# Altium PCB Top_old.PcbDoc (part 3 of 3)
Units mm, origin at the board's own origin, x right, y up, seen from the top; angles counter-clockwise.
Board outline 65.25 x 71.45 mm, 4 copper layers (Top Layer, GND, PWR_3V3, Bottom Layer), stack 0.603 mm thick; 141 components, 87 nets, 448 pads, 153 vias.
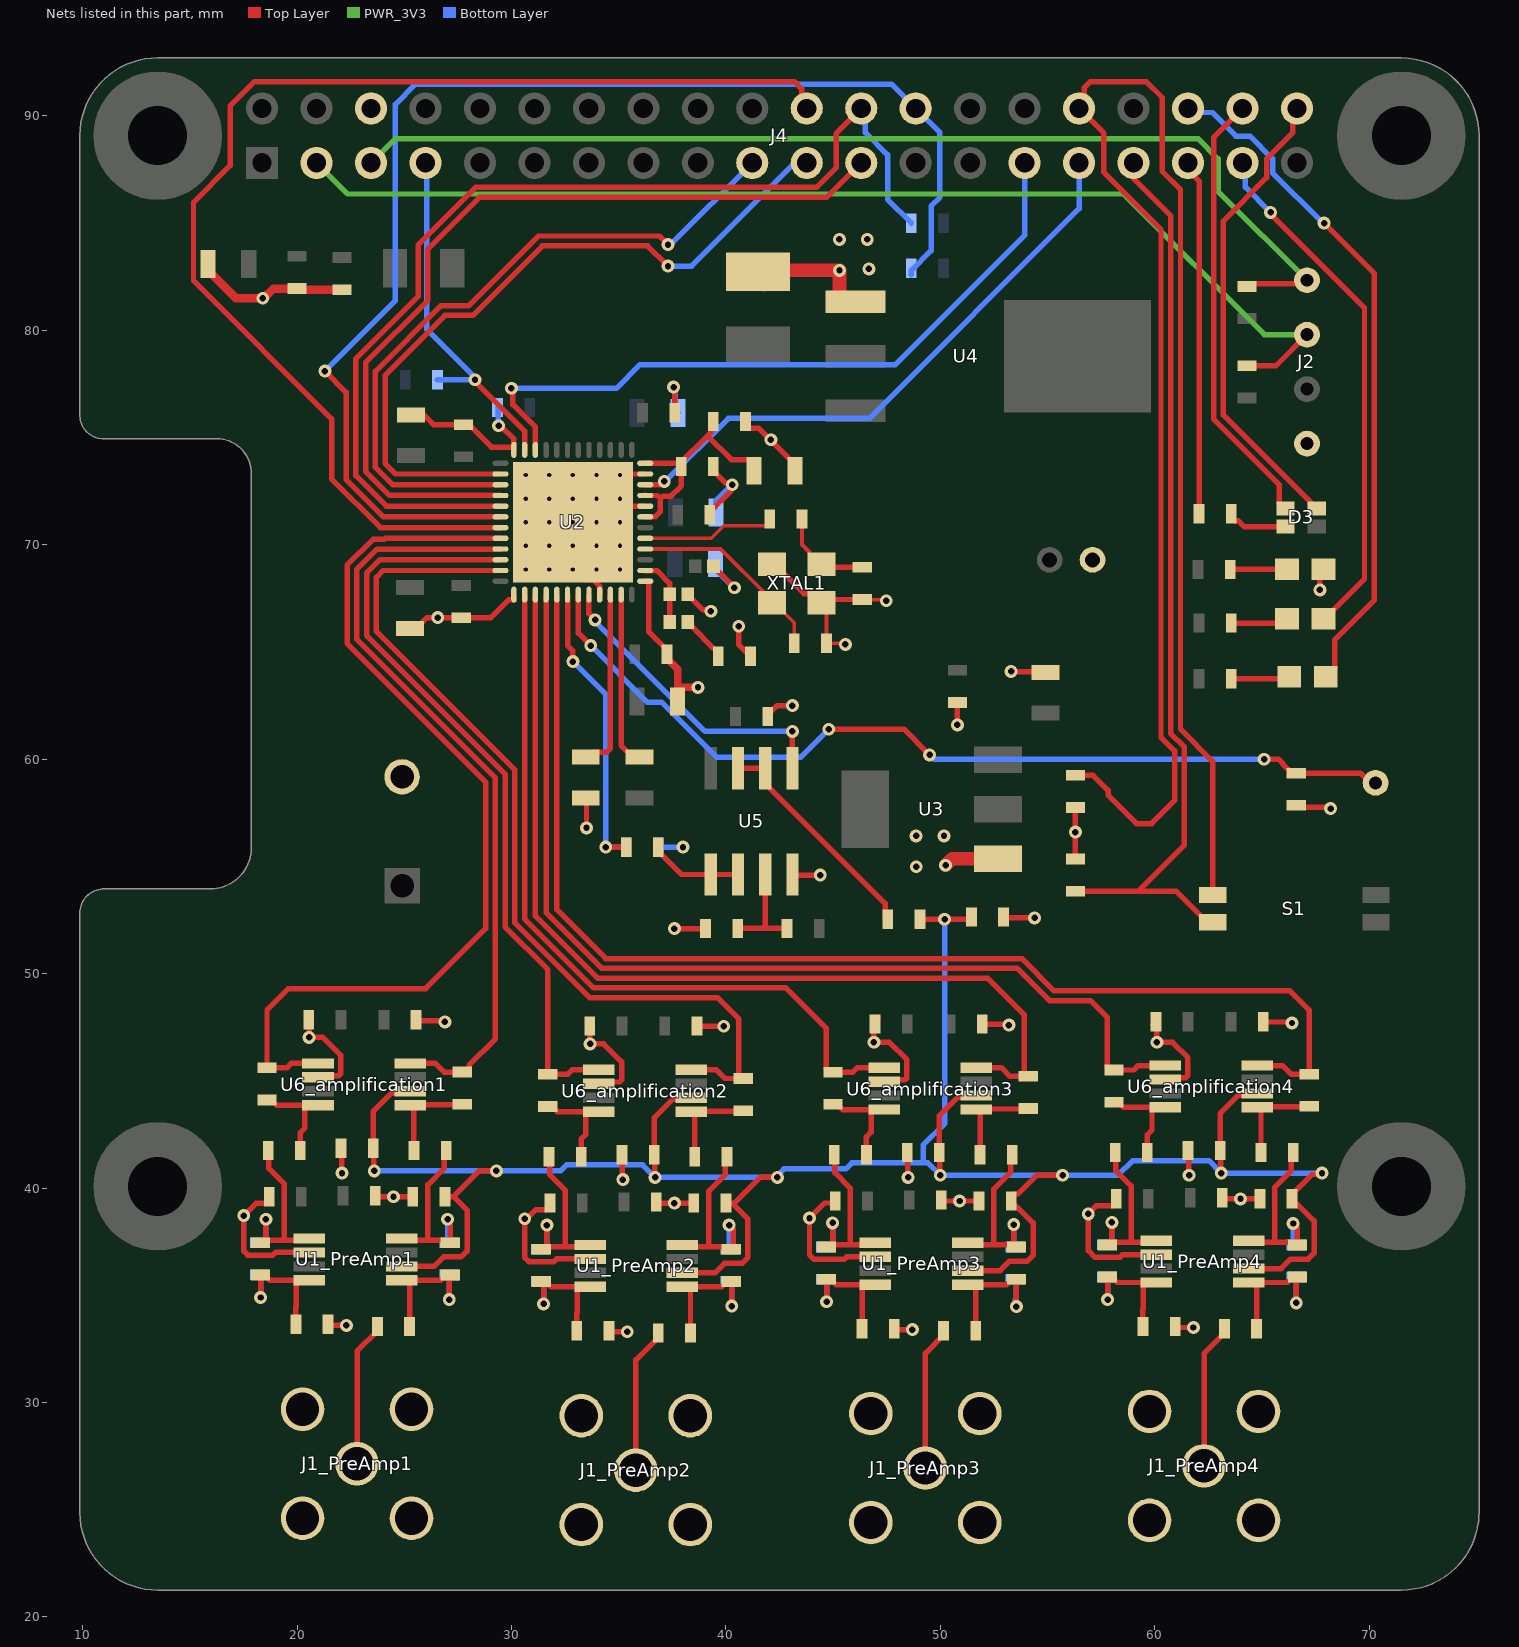
[diagram p4: the nets of this part, all layers, seen from the top]

## Via types
v1: diameter 0.6, hole 0.3, Top Layer to Bottom Layer, tented both sides, 128 vias
v2: diameter 0.5, hole 0.2, Top Layer to Bottom Layer, 25 vias

## Nets (pads, with @x,y where several pads share a name; then routed paths per layer and width w, separated by ;. In a path a pad name is that pad's centre, name@x,y a point inside that pad or via, vN(x,y) a via of type N, cw(c..) or ccw(c..) an arc to the next point about the centre after c; other vN are vias at no path point) (continued)
AINN1: R24_amplification1.2 U2.45 U6_amplification1.4 | length 36.6
  Top Layer w0.254: U6_amplification1.4@25.279,45.815 26.453,45.815 26.856,45.412 R24_amplification1.2@27.704,45.412 27.904,45.412 28.027,45.535 28.027,45.735 29.254,46.961 29.254,59.124 22.792,65.586 22.792,68.862 23.732,69.802 U2.45@29.491,69.802
AINN2: R24_amplification2.2 U2.47 U6_amplification2.4 | length 42.4
  Top Layer w0.254: U2.47@29.491,68.802 24.016,68.802 23.7,68.486 23.7,65.962 30.162,59.5 30.162,52.37 33.648,48.884 39.6,48.884 40.604,47.88 R24_amplification2.2@40.604,45.112 ; U6_amplification2.4@38.379,45.515 39.553,45.515 39.956,45.112 R24_amplification2.2@40.604,45.112 ; R24_amplification2.2@40.804,45.112 R24_amplification2.2@40.604,45.112
AINN3: R24_amplification3.2 U2.3 U6_amplification3.4 | length 45.1
  Top Layer w0.254: U2.3@31.116,67.677 31.116,52.7 34.024,49.792 52.208,49.792 53.904,48.096 R24_amplification3.2@53.904,45.212 ; U6_amplification3.4@51.679,45.615 52.853,45.615 53.256,45.212 R24_amplification3.2@53.904,45.212 ; R24_amplification3.2@54.104,45.212 R24_amplification3.2@53.904,45.212
AINN4: R24_amplification4.2 U2.5 U6_amplification4.4 | length 57.3
  Top Layer w0.254: U2.5@32.116,67.677 32.116,52.984 34.4,50.7 53.8,50.7 55.3,49.2 66.3,49.2 67.204,48.296 R24_amplification4.2@67.204,45.312 66.356,45.312 65.953,45.715 U6_amplification4.4@64.779,45.715
AINP1: R27_amplification1.2 U2.44 U6_amplification1.5 | length 44.2
  Top Layer w0.254: U6_amplification1.5@20.979,45.815 19.731,45.815 19.524,45.608 R27_amplification1.2@18.6,45.608 18.6,48.3 19.6,49.3 26,49.3 28.8,52.1 28.8,58.936 22.338,65.398 22.338,69.05 23.544,70.256 24.066,70.256 24.114,70.304 29.489,70.304 U2.44@29.491,70.302
AINP2: R27_amplification2.2 U2.46 U6_amplification2.5 | length 35.8
  Top Layer w0.254: U2.46@29.491,69.302 29.489,69.304 23.876,69.304 23.246,68.674 23.246,65.774 29.708,59.312 29.708,52.182 31.7,50.19 R27_amplification2.2@31.7,45.308 32.624,45.308 32.831,45.515 U6_amplification2.5@34.079,45.515
AINP3: R27_amplification3.2 U2.2 U6_amplification3.5 | length 36.1
  Top Layer w0.254: U2.2@30.616,67.677 30.616,52.558 33.836,49.338 42.8,49.338 44.677,47.461 44.677,45.531 44.8,45.408 R27_amplification3.2@45,45.408 45.924,45.408 46.131,45.615 U6_amplification3.5@47.379,45.615
AINP4: R27_amplification4.2 U2.4 U6_amplification4.5 | length 48.2
  Top Layer w0.254: U2.4@31.616,67.677 31.616,52.842 34.212,50.246 53.6,50.246 55.1,48.746 57,48.746 57.777,47.969 57.777,45.631 57.9,45.508 R27_amplification4.2@58.1,45.508 59.024,45.508 59.231,45.715 U6_amplification4.5@60.479,45.715
AUXIN1: C30.2 R14.2 U2.6 | length 14.4
  Top Layer w0.254: U2.6@32.616,67.677 32.616,65.302 32.866,65.052 v1(32.866,64.552) ; v1(34.4,55.9) R14.2@35.35,55.9
  Bottom Layer w0.254: v1(32.866,64.552) 34.4,63.018 v1(34.4,55.9) C30.2@35.35,55.9
BIASN: C17.1 U2.10 | length 8.5
  Top Layer w0.254: C17.1@33.466,60.102 33.689,60.325 34.439,60.325 34.618,60.504 34.618,67.675 U2.10@34.616,67.677
BIASP: C10.1 U2.11 | length 8.1
  Top Layer w0.254: U2.11@35.116,67.677 35.118,67.675 35.118,60.65 35.666,60.102 C10.1@35.966,60.102
CM: U2.8 U5.5 | length 14.4
  Top Layer w0.254: U2.8@33.616,67.677 33.614,67.675 33.614,66.786 v1(33.9,66.5) ; v1(43.1,61.3) 43.102,61.297 43.102,59.577 U5.5@43.105,59.575
  Bottom Layer w0.254: v1(33.9,66.5) 33.9,66.426 39.026,61.3 v1(43.1,61.3)
CM_filtered: C2_PreAmp1.2 C2_PreAmp2.2 C2_PreAmp3.2 C2_PreAmp4.2 C34.2 C37_amplification1.2 C37_amplification2.2 C37_amplification3.2 C37_amplification4.2 R22.2 U1_PreAmp1.2 U1_PreAmp2.2 U1_PreAmp3.2 U1_PreAmp4.2 U6_amplification1.2 U6_amplification2.2 U6_amplification3.2 U6_amplification4.2 | length 115
  Top Layer w0.254: v1(23.6,40.8) 23.577,40.823 23.577,41.835 C37_amplification1.2@23.554,41.858 23.554,43.577 24.409,44.432 25.196,44.432 U6_amplification1.2@25.279,44.515 ; U1_PreAmp1.2@24.874,36.349 26.39,36.349 26.832,36.791 27.657,36.791 27.93,37.065 27.93,38.97 27.297,39.603 ; C2_PreAmp1.2@26.904,39.603 27.297,39.603 ; v1(29.3,40.8) 28.493,40.8 27.297,39.603 ; C37_amplification2.2@36.654,41.558 36.654,43.277 37.509,44.132 38.296,44.132 U6_amplification2.2@38.379,44.215 ; v1@36.677,40.523 C37_amplification2.2@36.677,41.535 ; U1_PreAmp2.2@37.974,36.049 39.49,36.049 39.932,36.491 40.757,36.491 41.03,36.765 41.03,38.57 40.297,39.303 C2_PreAmp2.2@40.004,39.303 ; 40.397,39.303 41.593,40.5 v1(42.4,40.5) ; R22.2@49.05,52.54 v1(50.2,52.54) 51.35,52.54 C34.2@51.45,52.64 ; C37_amplification3.2@49.954,41.658 49.954,43.377 50.809,44.232 51.596,44.232 U6_amplification3.2@51.679,44.315 ; v1@49.977,40.623 C37_amplification3.2@49.977,41.635 ; U1_PreAmp3.2@51.274,36.149 52.79,36.149 53.232,36.591 54.057,36.591 54.33,36.865 54.33,38.377 C2_PreAmp3.2@53.304,39.403 53.304,39.603 53.427,39.726 53.627,39.726 54.501,40.6 v1(55.7,40.6) ; C37_amplification4.2@63.054,41.758 63.054,43.477 63.909,44.332 64.696,44.332 U6_amplification4.2@64.779,44.415 ; v1@63.077,40.723 C37_amplification4.2@63.077,41.735 ; U1_PreAmp4.2@64.374,36.249 65.89,36.249 66.332,36.691 67.157,36.691 67.43,36.965 67.43,38.477 C2_PreAmp4.2@66.404,39.503 66.404,39.703 67.335,40.634 67.734,40.634 v1(67.8,40.7)
  Bottom Layer w0.254: v1(23.6,40.8) v1(29.3,40.8) 32.297,40.8 32.578,41.081 36.119,41.081 v1(36.7,40.5) v1(42.4,40.5) 42.4,40.594 42.706,40.9 45.597,40.9 45.878,41.181 49.2,41.181 ; v1(50.2,52.54) 50.2,43 49.2,42 49.2,41.181 ; v1(67.8,40.7) v1(63.1,40.7) 62.519,41.281 58.978,41.281 58.297,40.6 v1(55.7,40.6) v1(50,40.6) 49.419,41.181 49.2,41.181
DVDD: C18.2 C19.2 C20.2 U2.19 U2.21 U2.24 | length 11.7
  Top Layer w0.254: U2.19@36.241,71.302 36.243,71.304 36.701,71.304 36.949,71.552 36.949,72.152 ; U2.21@36.241,72.302 36.243,72.3 36.801,72.3 36.949,72.152 ; U2.24@36.241,73.802 37.793,73.802 C19.2@37.916,73.679 ; 39.091,75.027 37.916,73.852 C19.2@37.916,73.679 ; C20.2@39.416,75.752 39.293,75.629 39.293,75.229 39.147,75.083 40.255,73.975 41.093,73.975 41.316,73.752 C18.2@41.316,73.452 ; 36.949,72.152 37.068,72.271 37.448,72.271 37.903,72.726 37.903,72.73 37.916,72.743 C19.2@37.916,73.652 C19.2@37.916,73.679
GND: B1.2 C2_PreAmp1.1 C2_PreAmp2.1 C2_PreAmp3.1 C2_PreAmp4.1 C3_PreAmp1.2 C3_PreAmp2.2 C3_PreAmp3.2 C3_PreAmp4.2 C4_PreAmp1.2 C4_PreAmp2.2 C4_PreAmp3.2 C4_PreAmp4.2 C6.2 C7.1 C8.2 C9.1 C11.1 C12.2 C13.1 C14.2 C15.1 C16.2 C17.2 C18.1 C19.1 C20.1 C22.1 C23.1 C24.1 C25.1 C26.1 C27.1 C28.1 C29.2 C30.1 C31.2 C32.2 C33.2 C34.1 C35.1 C36.1 C37_amplification1.1 C37_amplification2.1 C37_amplification3.1 C37_amplification4.1 C38_amplification1.2 C38_amplification2.2 C38_amplification3.2 C38_amplification4.2 C39_amplification1.2 C39_amplification2.2 C39_amplification3.2 C39_amplification4.2 D1.2 J1_PreAmp1.2 J1_PreAmp2.2 J1_PreAmp3.2 J1_PreAmp4.2 J2.1 J4.6 R3_PreAmp1.1 R3_PreAmp2.1 R3_PreAmp3.1 R3_PreAmp4.1 R5.1 R6.1 R12.1 R15.1 R20.1 R21.1 U1_PreAmp1.6 U1_PreAmp2.6 U1_PreAmp3.6 U1_PreAmp4.6 U2.1 U2.9 U2.13 U2.20 U2.23 U2.36 U2.49 U3.1 U4.1 U5.4 U6_amplification1.6 U6_amplification2.6 U6_amplification3.6 U6_amplification4.6 XTAL1.2 XTAL1.4 | length 154.5
  Top Layer w0.175: XTAL1.2@44.607,67.449 XTAL1.2@44.457,67.299 44.692,67.064 C35.1@44.692,65.405 v1@45.593,65.405 ; C36.1@46.609,67.449 C36.1@46.355,67.449 46.367,67.437 v1@47.478,67.437
  Top Layer w0.254: C3_PreAmp1.2@18.477,39.3 18.1,39.3 v1(17.518,38.718) 17.518,37.065 17.709,36.873 18.88,36.873 19.006,36.999 U1_PreAmp1.6@20.574,36.999 ; C3_PreAmp1.2@18.7,39.523 C3_PreAmp1.2@18.7,39.603 ; C38_amplification1.2@20.677,48.181 20.554,48.058 C38_amplification1.2@20.554,47.858 20.567,47.845 v1(20.567,47.027) 21.205,47.027 22.041,46.19 22.041,45.341 21.948,45.248 21.062,45.248 U6_amplification1.6@20.979,45.165 ; R3_PreAmp1.1@21.45,33.645 21.495,33.6 v1(22.3,33.6) ; C37_amplification1.1@22.054,41.858 22.077,41.835 22.077,40.723 v1(22.1,40.7) ; C4_PreAmp1.2@23.65,39.648 23.698,39.6 v1(24.5,39.6) 25.401,39.6 C2_PreAmp1.1@25.404,39.603 ; C15.1@25.266,66.102 25.566,66.102 26.066,66.602 v1(26.566,66.602) C16.2@27.666,66.602 29.041,66.602 29.868,67.429 30.114,67.429 30.116,67.431 U2.1@30.116,67.677 ; C39_amplification1.2@25.554,48.058 C39_amplification1.2@25.554,47.858 25.612,47.8 v1@26.9,47.8 ; C6.2@25.566,76.102 25.866,76.102 26.366,75.602 28.02,75.602 29.066,74.556 U2.36@30.114,74.556 ; v1(29.4,75.55) 29.501,75.55 30.114,74.937 U2.36@30.114,74.556 ; U2.36@30.118,74.425 U2.36@30.116,74.427 30.116,74.554 U2.36@30.114,74.556 ; C3_PreAmp2.2@31.8,39.303 31.682,39.185 31.682,39.005 31.677,39 31.14,39 30.711,38.571 v1(30.618,38.571) 30.618,36.765 30.809,36.573 31.98,36.573 32.106,36.699 U1_PreAmp2.6@33.674,36.699 ; v2(32.866,71.052) U2.49@33.616,71.802 ; U2.49@33.429,68.379 33.803,68.379 34.114,68.068 34.114,67.679 U2.9@34.116,67.677 U2.9@34.118,67.675 ; C17.2@33.466,58.202 33.5,58.168 v1(33.5,56.8) ; C38_amplification2.2@33.654,47.558 33.661,47.551 33.661,46.733 v1(33.667,46.727) 34.305,46.727 35.141,45.89 35.141,45.041 35.048,44.948 34.162,44.948 U6_amplification2.6@34.079,44.865 ; R3_PreAmp2.1@34.55,33.345 34.595,33.3 v1(35.4,33.3) ; C37_amplification2.1@35.154,41.558 35.177,41.535 35.177,40.423 v1(35.2,40.4) ; U2.13@36.241,68.302 36.398,68.302 36.4,68.3 36.4,65.95 37.25,65.1 C12.2@37.25,64.9 C12.2@37.25,64.7 ; U2.20@36.241,71.802 U2.49@33.616,71.802 ; U2.23@36.241,73.302 35.116,73.302 v2(35.066,73.252) v2(33.966,72.152) U2.49@33.616,71.802 ; C4_PreAmp2.2@36.75,39.348 36.798,39.3 v1(37.6,39.3) 38.501,39.3 C2_PreAmp2.1@38.504,39.303 ; v1(37.6,52.1) 39.039,52.1 R15.1@39.05,52.111 ; C9.1@37.616,76.152 v1@37.616,77.352 ; C11.1@37.812,62.638 37.812,62.7 C11.1@37.812,63.188 ; C24.1@38.22,67.7 38.22,67.68 38.934,66.966 39.234,66.966 v1(39.3,66.9) ; C39_amplification2.2@38.612,47.547 v1(39.9,47.547) ; C39_amplification2.2@38.654,47.558 C39_amplification2.2@38.654,47.758 ; C14.2@39.266,71.352 39.266,71.552 40.234,72.52 40.234,72.734 v1(40.3,72.8) 40.234,72.866 40.002,72.866 39.416,73.452 C19.1@39.416,73.652 ; C23.1@39.404,69.159 39.404,68.884 C23.1@39.42,68.9 ; C23.1@39.42,69 39.42,68.98 v1(40.4,68) ; v1(40.6,66.2) 40.6,65.35 R5.1@41.15,64.8 ; C20.1@40.916,75.752 40.916,75.552 41.039,75.429 41.539,75.429 43.216,73.752 C18.1@43.216,73.452 ; C29.2@41.95,61.989 41.95,62.066 42.384,62.5 v1(43.1,62.5) ; XTAL1.4@42.157,69.099 42.257,69.099 43.634,67.722 44.034,67.722 XTAL1.2@44.457,67.299 ; U5.4@43.105,54.625 43.13,54.6 v1(44.4,54.6) ; XTAL1.2@44.607,67.449 C36.1@46.355,67.449 ; C3_PreAmp3.2@45.1,39.403 45.1,39.306 44.609,39.306 43.903,38.6 v1(43.9,38.6) 43.9,36.882 44.109,36.673 45.512,36.673 45.638,36.799 U1_PreAmp3.6@46.974,36.799 ; C38_amplification3.2@46.831,47.6 C38_amplification3.2@46.9,47.531 ; C38_amplification3.2@47.077,47.981 46.954,47.858 C38_amplification3.2@46.954,47.658 46.9,47.603 C38_amplification3.2@46.9,47.531 ; U6_amplification3.6@47.379,44.965 47.462,45.048 48.348,45.048 48.441,45.141 48.441,45.99 47.631,46.8 v1(46.9,46.8) C38_amplification3.2@46.9,47.531 ; R3_PreAmp3.1@47.85,33.445 47.895,33.4 v1(48.7,33.4) ; C37_amplification3.1@48.454,41.658 48.477,41.635 48.477,40.523 v1(48.5,40.5) ; C4_PreAmp3.2@50.05,39.448 50.098,39.4 v1(50.9,39.4) 51.801,39.4 C2_PreAmp3.1@51.804,39.403 ; v1(50.8,61.6) C25.1@50.8,62.65 ; C39_amplification3.2@51.912,47.647 v1@53.2,47.647 ; C39_amplification3.2@51.954,47.658 C39_amplification3.2@51.954,47.858 ; C34.1@52.95,52.64 52.99,52.6 v1(54.4,52.6) ; v1(53.3,64.1) 53.325,64.075 54.875,64.075 C26.1@54.9,64.05 ; R21.1@56.3,55.35 v1(56.3,56.6) R20.1@56.3,57.75 ; C3_PreAmp4.2@58.2,39.503 58.2,39.303 58.077,39.18 57.28,39.18 v1(56.9,38.8) 56.9,37.082 57.209,36.773 58.38,36.773 58.506,36.899 U1_PreAmp4.6@60.074,36.899 ; C38_amplification4.2@59.898,47.602 60.1,47.4 v1(60.1,46.8) 60.831,46.8 61.541,46.09 61.541,45.241 61.448,45.148 60.562,45.148 U6_amplification4.6@60.479,45.065 ; C38_amplification4.2@60.067,47.745 C38_amplification4.2@60.054,47.758 60.054,47.958 C38_amplification4.2@60.177,48.081 ; R3_PreAmp4.1@60.95,33.545 60.995,33.5 v1(61.8,33.5) ; C37_amplification4.1@61.554,41.758 61.577,41.735 61.577,40.623 v1(61.6,40.6) ; C4_PreAmp4.2@63.15,39.548 63.198,39.5 v1(64,39.5) 64.901,39.5 C2_PreAmp4.1@64.904,39.503 ; C39_amplification4.2@65.054,47.758 C39_amplification4.2@65.054,47.958 ; C39_amplification4.2@65.112,47.747 v1@66.4,47.747 ; R12.1@66.6,57.85 66.684,57.766 68.134,57.766 v1(68.2,57.7) ; v1(67.7,67.9) 67.7,68.681 D1.2@67.869,68.85
  Top Layer w0.35: C12.2@37.25,64.7 37.75,64.2 37.75,63.227 C11.1@37.812,63.288 ; C11.1@37.812,62.638 C11.1@37.75,62.7 C11.1@37.812,62.7 ; C11.1@37.812,63.188 37.973,63.35 v1(38.7,63.35)
  Top Layer w0.4: C31.2@15.85,83.1 15.85,82.8 17.15,81.5 v1(18.4,81.5) 18.454,81.5 18.904,81.95 C33.2@20,81.95 20.05,81.9 C32.2@22.1,81.9
  Top Layer w0.635: C28.1@41.5,82.725 41.575,82.8 v1(45.3,82.8) 45.3,81.548 45.508,81.34 U4.1@46.045,81.34 ; C28.1@41.8,82.125 C28.1@42.112,82.437 ; v1(50.246,55.054) 50.548,55.356 U3.1@52.699,55.356
  Bottom Layer w0.254: R6.1@29.35,76.4 29.375,76.375 29.375,75.575 v1(29.4,75.55) ; C30.1@36.85,55.9 v1(38,55.9) ; v1(37.566,77.352) 37.632,77.286 37.632,76.286 C8.2@37.766,76.152 ; C22.1@39.516,69.152 39.516,68.852 40.4,67.968 v1@40.4,67.9 ; C13.1@39.516,71.752 39.516,72.052 40.264,72.8 v1(40.3,72.8)
  other v1: 53.2,47.6 66.4,47.7 26.9,47.753 48.878,54.984 48.873,56.427 50.173,56.427 45.573,65.358 47.478,67.39 42.1,74.9 46.668,82.87 45.295,84.243 46.595,84.243
  other v2: 30.666,68.852 31.766,68.852 32.866,68.852 33.966,68.852 35.066,68.852 30.666,69.952 31.766,69.952 32.866,69.952 33.966,69.952 35.066,69.952 30.666,71.052 31.766,71.052 33.966,71.052 35.066,71.052 30.666,72.152 31.766,72.152 32.866,72.152 35.066,72.152 30.666,73.252 31.766,73.252 32.866,73.252 33.966,73.252
GPIO2: J4.22 U2.43 | length 57.9
  Top Layer w0.254: U2.43@29.491,70.802 23.888,70.802 21.619,73.071 21.619,75.869 15.173,82.315 15.173,85.97 16.883,87.68 16.883,90.46 18.023,91.6 43.2,91.6 43.534,91.266 43.534,90.588 J4.22@43.772,90.35
GPIO3: J4.26 R7.1 U2.42 | length 61.8
  Top Layer w0.254: v1(21.3,78.1) 22.289,77.111 22.289,73.043 24.03,71.302 U2.42@29.491,71.302 ; J4.26@48.9,90.9 48.852,90.852 J4.26@48.852,90.35 J4.26@48.947,90.445
  Bottom Layer w0.254: v1(21.3,78.1) 24.583,81.383 24.583,90.54 25.524,91.481 47.721,91.481 J4.26@48.852,90.35 49.983,89.219 49.983,86.206 49.573,85.796 49.573,83.723 48.65,82.8 R7.1@48.65,82.6
GPIO4: J4.7 R9.1 U2.35 | length 17
  Top Layer w0.254: v1(28.3,77.7) 28.3,77.613 30.616,75.297 U2.35@30.616,74.427
  Bottom Layer w0.254: J4.7@25.992,87.81 26.046,87.756 26.046,80.054 28.3,77.8 v1(28.3,77.7) R9.1@26.55,77.7
GPIO5: J4.29 U2.34 | length 33.6
  Top Layer w0.254: v1(30,77.3) 30.066,77.234 30.066,76.534 31.116,75.484 U2.34@31.116,74.427
  Bottom Layer w0.254: v1(30,77.3) 34.9,77.3 36,78.4 47.9,78.4 53.932,84.432 J4.29@53.932,87.81
GPIO6: J4.31 U2.22 | length 27.7
  Top Layer w0.254: U2.22@36.241,72.802 36.243,72.804 36.924,72.804 37.076,72.956 v1(37.128,72.956)
  Bottom Layer w0.254: v1(37.128,72.956) 37.17,72.956 40.114,75.9 46.7,75.9 56.472,85.672 J4.31@56.472,87.81
MISO: J4.21 U2.38 | length 34.3
  Top Layer w0.254: U2.38@29.491,73.302 24.598,73.302 24.105,73.795 24.105,77.905 26.9,80.7 28.2,80.7 31.446,83.946 36.354,83.946 v1(37.3,83)
  Bottom Layer w0.254: v1(37.3,83) 38.4,83 43.21,87.81 J4.21@43.772,87.81
MOSI: J4.19 U2.39 | length 32.6
  Top Layer w0.254: U2.39@29.491,72.802 24.456,72.802 23.651,73.607 23.651,78.093 26.712,81.154 28.012,81.154 31.258,84.4 36.9,84.4 v1(37.3,84)
  Bottom Layer w0.254: v1(37.3,84) 37.422,84 J4.19@41.232,87.81
NetC1_PreAmp1_1: C1_PreAmp1.1 R1_PreAmp1.1 R2_PreAmp1.2 U1_PreAmp1.1 | length 6.8
  Top Layer w0.254: U1_PreAmp1.1@24.874,35.699 U1_PreAmp1.1@25.137,35.699 ; R2_PreAmp1.2@25.25,33.545 25.25,35.586 U1_PreAmp1.1@25.137,35.699 ; v1(27.1,34.8) C1_PreAmp1.1@27.1,35.897 ; C1_PreAmp1.1@27.153,35.95 26.953,35.95 26.702,35.699 U1_PreAmp1.1@25.137,35.699
  Bottom Layer w0.254: v1(27.1,34.8) R1_PreAmp1.1@27.1,35.95
NetC1_PreAmp1_2: C1_PreAmp1.2 R1_PreAmp1.2 R25_amplification1.1 U1_PreAmp1.4 | length 8.8
  Top Layer w0.254: U1_PreAmp1.4@24.874,37.649 24.957,37.566 C1_PreAmp1.2@26.837,37.566 ; 26.1,37.6 26.1,40.152 26.875,40.927 26.875,41.678 R25_amplification1.1@26.954,41.758 ; C1_PreAmp1.2@26.83,37.573 C1_PreAmp1.2@26.837,37.566 ; 27.153,38.247 C1_PreAmp1.2@27.153,37.45 26.953,37.45 C1_PreAmp1.2@26.837,37.566
  Bottom Layer w0.254: v1(27.025,38.55) 27.025,37.525 R1_PreAmp1.2@27.1,37.45
NetC1_PreAmp2_1: C1_PreAmp2.1 R1_PreAmp2.1 R2_PreAmp2.2 U1_PreAmp2.1 | length 6.9
  Top Layer w0.254: U1_PreAmp2.1@37.974,35.399 U1_PreAmp2.1@38.237,35.399 ; R2_PreAmp2.2@38.35,33.245 38.35,35.286 U1_PreAmp2.1@38.237,35.399 ; C1_PreAmp2.1@40.253,35.65 40.053,35.65 39.802,35.399 U1_PreAmp2.1@38.237,35.399 ; v1(40.275,34.5) 40.275,35.572 C1_PreAmp2.1@40.3,35.597
  Bottom Layer w0.254: v1(40.275,34.5) 40.275,35.625 R1_PreAmp2.1@40.3,35.65
NetC1_PreAmp2_2: C1_PreAmp2.2 R1_PreAmp2.2 R25_amplification2.1 U1_PreAmp2.4 | length 9.3
  Top Layer w0.254: U1_PreAmp2.4@37.974,37.349 38.057,37.266 C1_PreAmp2.2@39.937,37.266 ; 39.2,37.3 39.2,39.852 39.975,40.627 39.975,41.378 R25_amplification2.1@40.054,41.458 ; C1_PreAmp2.2@39.93,37.273 C1_PreAmp2.2@39.937,37.266 ; v1(40.152,38.277) 40.353,38.076 C1_PreAmp2.2@40.353,37.15 ; C1_PreAmp2.2@40.253,37.15 40.053,37.15 C1_PreAmp2.2@39.937,37.266
  Bottom Layer w0.254: v1(40.152,38.277) 40.152,37.298 R1_PreAmp2.2@40.3,37.15
NetC1_PreAmp3_1: C1_PreAmp3.1 R1_PreAmp3.1 R2_PreAmp3.2 U1_PreAmp3.1 | length 7.5
  Top Layer w0.254: U1_PreAmp3.1@51.274,35.499 U1_PreAmp3.1@51.537,35.499 ; R2_PreAmp3.2@51.65,33.345 51.65,35.386 U1_PreAmp3.1@51.537,35.499 ; v1(53.55,34.475) 53.55,35.647 53.5,35.697 C1_PreAmp3.1@53.553,35.75 53.353,35.75 53.102,35.499 U1_PreAmp3.1@51.537,35.499
  Bottom Layer w0.254: 53.5,34.8 53.55,34.75 v1(53.55,34.475) 53.55,35.7 R1_PreAmp3.1@53.5,35.75
NetC1_PreAmp3_2: C1_PreAmp3.2 R1_PreAmp3.2 R25_amplification3.1 U1_PreAmp3.4 | length 9.1
  Top Layer w0.254: U1_PreAmp3.4@51.274,37.449 51.357,37.366 C1_PreAmp3.2@53.237,37.366 ; 52.5,37.4 52.5,39.952 53.275,40.727 53.275,41.478 R25_amplification3.1@53.354,41.558 ; C1_PreAmp3.2@53.23,37.373 C1_PreAmp3.2@53.237,37.366 ; v1(53.425,38.3) 53.425,37.378 C1_PreAmp3.2@53.553,37.25 53.353,37.25 C1_PreAmp3.2@53.237,37.366
  Bottom Layer w0.254: v1(53.425,38.3) 53.425,37.325 R1_PreAmp3.2@53.5,37.25
NetC1_PreAmp4_1: C1_PreAmp4.1 R1_PreAmp4.1 R2_PreAmp4.2 U1_PreAmp4.1 | length 6.9
  Top Layer w0.254: U1_PreAmp4.1@64.374,35.599 U1_PreAmp4.1@64.637,35.599 ; R2_PreAmp4.2@64.75,33.445 64.75,35.486 U1_PreAmp4.1@64.637,35.599 ; v1(66.6,34.65) C1_PreAmp4.1@66.6,35.797 ; C1_PreAmp4.1@66.653,35.85 66.453,35.85 66.202,35.599 U1_PreAmp4.1@64.637,35.599
  Bottom Layer w0.254: v1(66.6,34.65) R1_PreAmp4.1@66.6,35.85
NetC1_PreAmp4_2: C1_PreAmp4.2 R1_PreAmp4.2 R25_amplification4.1 U1_PreAmp4.4 | length 8.7
  Top Layer w0.254: U1_PreAmp4.4@64.374,37.549 64.457,37.466 C1_PreAmp4.2@66.337,37.466 ; 65.6,37.5 65.6,40.052 66.375,40.827 66.375,41.578 R25_amplification4.1@66.454,41.658 ; C1_PreAmp4.2@66.33,37.473 C1_PreAmp4.2@66.337,37.466 ; v1@66.653,38.147 C1_PreAmp4.2@66.653,37.35 66.453,37.35 C1_PreAmp4.2@66.337,37.466
  Bottom Layer w0.254: v1(66.45,38.35) 66.45,37.5 R1_PreAmp4.2@66.6,37.35
NetC5_PreAmp1_1: C5_PreAmp1.1 R3_PreAmp1.2 R4_PreAmp1.1 U1_PreAmp1.8 | length 6.5
  Top Layer w0.254: C5_PreAmp1.1@18.295,35.95 18.495,35.95 18.746,35.699 U1_PreAmp1.8@20.079,35.699 ; v1(18.3,34.9) C5_PreAmp1.1@18.3,35.945 ; R3_PreAmp1.2@19.95,33.645 19.95,34.476 19.966,34.492 19.966,35.586 U1_PreAmp1.8@20.079,35.699 ; U1_PreAmp1.8@20.574,35.699 U1_PreAmp1.8@20.079,35.699
  Bottom Layer w0.254: v1(18.3,34.9) R4_PreAmp1.1@18.3,35.91
NetC5_PreAmp1_2: C5_PreAmp1.2 R4_PreAmp1.2 R26_amplification1.1 U1_PreAmp1.5 | length 8.8
  Top Layer w0.254: C5_PreAmp1.2@18.295,37.45 18.495,37.45 C5_PreAmp1.2@18.611,37.566 ; C5_PreAmp1.2@18.5,37.573 18.55,37.623 v1(18.55,38.55) ; C5_PreAmp1.2@18.618,37.573 C5_PreAmp1.2@18.611,37.566 ; R26_amplification1.1@18.654,41.758 18.679,41.732 18.679,40.927 19.4,40.206 19.4,37.566 C5_PreAmp1.2@18.611,37.566 ; 19.5,37.566 20.491,37.566 U1_PreAmp1.5@20.574,37.649
  Bottom Layer w0.254: R4_PreAmp1.2@18.5,37.577 18.55,37.627 v1(18.55,38.55)
NetC5_PreAmp2_1: C5_PreAmp2.1 R3_PreAmp2.2 R4_PreAmp2.1 U1_PreAmp2.8 | length 6.5
  Top Layer w0.254: C5_PreAmp2.1@31.395,35.65 31.595,35.65 31.846,35.399 U1_PreAmp2.8@33.179,35.399 ; v1(31.5,34.6) C5_PreAmp2.1@31.5,35.645 ; R3_PreAmp2.2@33.05,33.345 33.05,34.176 33.066,34.192 33.066,35.286 U1_PreAmp2.8@33.179,35.399 ; U1_PreAmp2.8@33.674,35.399 U1_PreAmp2.8@33.179,35.399
  Bottom Layer w0.254: v1(31.5,34.6) R4_PreAmp2.1@31.5,35.61
NetC5_PreAmp2_2: C5_PreAmp2.2 R4_PreAmp2.2 R26_amplification2.1 U1_PreAmp2.5 | length 8.8
  Top Layer w0.254: C5_PreAmp2.2@31.395,37.15 31.595,37.15 C5_PreAmp2.2@31.711,37.266 ; v1(31.652,38.277) 31.652,37.321 C5_PreAmp2.2@31.7,37.273 ; C5_PreAmp2.2@31.718,37.273 C5_PreAmp2.2@31.711,37.266 ; R26_amplification2.1@31.754,41.458 31.779,41.432 31.779,40.627 32.5,39.906 32.5,37.266 C5_PreAmp2.2@31.711,37.266 ; 32.6,37.266 33.591,37.266 U1_PreAmp2.5@33.674,37.349
  Bottom Layer w0.254: v1(31.652,38.277) 31.652,37.326 R4_PreAmp2.2@31.7,37.277
NetC5_PreAmp3_1: C5_PreAmp3.1 R3_PreAmp3.2 R4_PreAmp3.1 U1_PreAmp3.8 | length 6.6
  Top Layer w0.254: v1(44.7,34.7) 44.7,35.745 C5_PreAmp3.1@44.695,35.75 44.895,35.75 45.146,35.499 U1_PreAmp3.8@46.479,35.499 ; R3_PreAmp3.2@46.35,33.445 46.35,34.276 46.366,34.292 46.366,35.386 U1_PreAmp3.8@46.479,35.499 ; U1_PreAmp3.8@46.974,35.499 U1_PreAmp3.8@46.479,35.499
  Bottom Layer w0.254: R4_PreAmp3.1@44.655,35.754 44.7,35.71 v1(44.7,34.7)
NetC5_PreAmp3_2: C5_PreAmp3.2 R4_PreAmp3.2 R26_amplification3.1 U1_PreAmp3.5 | length 9.3
  Top Layer w0.254: C5_PreAmp3.2@44.695,37.25 C5_PreAmp3.2@44.777,37.25 ; v1(44.977,38.377) 44.977,37.45 C5_PreAmp3.2@44.777,37.25 ; R26_amplification3.1@45.054,41.558 45.079,41.532 45.079,40.727 45.8,40.006 45.8,37.366 45.011,37.366 44.895,37.25 C5_PreAmp3.2@44.777,37.25 ; 45.9,37.366 46.891,37.366 U1_PreAmp3.5@46.974,37.449
  Bottom Layer w0.254: R4_PreAmp3.2@44.655,37.254 44.777,37.254 44.977,37.454 v1(44.977,38.377)
NetC5_PreAmp4_1: C5_PreAmp4.1 R3_PreAmp4.2 R4_PreAmp4.1 U1_PreAmp4.8 | length 6.5
  Top Layer w0.254: C5_PreAmp4.1@57.795,35.85 57.995,35.85 58.246,35.599 U1_PreAmp4.8@59.579,35.599 ; v1(57.8,34.8) C5_PreAmp4.1@57.8,35.845 ; R3_PreAmp4.2@59.45,33.545 59.45,34.376 59.466,34.392 59.466,35.486 U1_PreAmp4.8@59.579,35.599 ; U1_PreAmp4.8@60.074,35.599 U1_PreAmp4.8@59.579,35.599
  Bottom Layer w0.254: v1(57.8,34.8) R4_PreAmp4.1@57.8,35.81
NetC5_PreAmp4_2: C5_PreAmp4.2 R4_PreAmp4.2 R26_amplification4.1 U1_PreAmp4.5 | length 8.6
  Top Layer w0.254: C5_PreAmp4.2@57.795,37.35 57.995,37.35 C5_PreAmp4.2@58.111,37.466 ; C5_PreAmp4.2@58,37.473 v1(58,38.4) ; C5_PreAmp4.2@58.118,37.473 C5_PreAmp4.2@58.111,37.466 ; R26_amplification4.1@58.154,41.658 58.179,41.632 58.179,40.827 58.9,40.106 58.9,37.466 C5_PreAmp4.2@58.111,37.466 ; 59,37.466 59.991,37.466 U1_PreAmp4.5@60.074,37.549
  Bottom Layer w0.254: R4_PreAmp4.2@58,37.477 v1(58,38.4)
NetC21_1: C21.1 R5.2 | length 1.9
  Top Layer w0.254: C21.1@38.22,66.5 38.42,66.3 38.42,66.18 R5.2@39.45,65.15
NetC36_2: C36.2 R23.1 XTAL1.3 | length 4.8
  Top Layer w0.15: 43.882,69.674 43.882,69.574 44.357,69.099 XTAL1.3@44.457,69.099
  Top Layer w0.2: R23.1@43.549,71.247 43.549,70.007 43.882,69.674
  Top Layer w0.254: XTAL1.3@44.457,69.099 44.607,68.949 C36.2@46.609,68.949
NetD1_1: D1.1 R16.1 | length 2.7
  Top Layer w0.254: R16.1@63.519,68.85 D1.1@66.169,68.85
NetD2_1: D2.1 R17.1 | length 2.7
  Top Layer w0.254: R17.1@63.569,63.75 66.169,63.75 D2.1@66.269,63.85
NetD3_1: D3.1 R18.2 | length 2.9
  Top Layer w0.254: R18.2@63.569,71.45 63.569,71.25 63.692,71.127 63.892,71.127 64.169,70.85 D3.1@66.1,70.85
NetD4_1: D4.1 R19.1 | length 2.7
  Top Layer w0.254: R19.1@63.569,66.35 65.969,66.35 D4.1@66.169,66.55
NetJ1_PreAmp1_1: J1_PreAmp1.1 R2_PreAmp1.1 | length 6.8
  Top Layer w0.254: J1_PreAmp1.1@22.8,27.148 22.8,32.395 23.75,33.345 R2_PreAmp1.1@23.75,33.545
NetJ1_PreAmp2_1: J1_PreAmp2.1 R2_PreAmp2.1 | length 6.8
  Top Layer w0.254: J1_PreAmp2.1@35.8,26.847 35.8,31.995 36.85,33.045 R2_PreAmp2.1@36.85,33.245
NetJ1_PreAmp3_1: J1_PreAmp3.1 R2_PreAmp3.1 | length 6.7
  Top Layer w0.254: J1_PreAmp3.1@49.3,26.947 49.3,32.295 50.15,33.145 R2_PreAmp3.1@50.15,33.345
NetJ1_PreAmp4_1: J1_PreAmp4.1 R2_PreAmp4.1 | length 6.8
  Top Layer w0.254: J1_PreAmp4.1@62.3,27.047 62.3,32.295 63.25,33.245 R2_PreAmp4.1@63.25,33.445
NetJ3_1: J3.1 R12.2 U2.7 | length 43
  Top Layer w0.254: U2.7@33.118,67.679 U2.7@33.116,67.677 33.116,65.884 v1(33.7,65.3) ; v1(44.8,61.4) 48.3,61.4 v1(49.5,60.2) ; v1(65.1,60) 65.781,60 65.961,59.82 65.961,59.789 66.4,59.35 R12.2@66.6,59.35 69.594,59.35 70.044,58.9 J3.1@70.3,58.9
  Bottom Layer w0.254: v1(33.7,65.3) 36.333,62.667 36.996,62.667 39.563,60.1 43.5,60.1 v1(44.8,61.4) ; v1(49.5,60.2) 49.7,60 v1(65.1,60)
NetR13_2: R13.2 R15.2 U5.3 | length 4.8
  Top Layer w0.254: R15.2@40.55,52.111 41.9,52.111 ; U5.3@41.835,54.625 41.835,52.176 41.9,52.111 ; R13.2@42.85,52.111 41.9,52.111
NetR14_1: R14.1 U5.1 U5.2 | length 4.4
  Top Layer w0.254: R14.1@36.85,55.9 36.85,55.7 37.925,54.625 U5.1@39.295,54.625 U5.2@40.565,54.625
NetR22_1: R22.1 U5.6 U5.7 | length 10.7
  Top Layer w0.254: U5.7@40.565,59.575 U5.6@41.835,59.575 41.835,58.875 47.427,53.283 47.427,52.663 R22.1@47.55,52.54
NetR24_amplification1_1: R24_amplification1.1 R25_amplification1.2 U6_amplification1.1 | length 4.7
  Top Layer w0.254: R25_amplification1.2@25.454,41.758 25.454,43.752 25.341,43.865 U6_amplification1.1@25.279,43.865 25.303,43.888 27.681,43.888 R24_amplification1.1@27.704,43.912
NetR24_amplification2_1: R24_amplification2.1 R25_amplification2.2 U6_amplification2.1 | length 4.7
  Top Layer w0.254: R25_amplification2.2@38.554,41.458 38.554,43.452 38.441,43.565 U6_amplification2.1@38.379,43.565 38.403,43.588 40.781,43.588 R24_amplification2.1@40.804,43.612
NetR24_amplification3_1: R24_amplification3.1 R25_amplification3.2 U6_amplification3.1 | length 4.7
  Top Layer w0.254: R25_amplification3.2@51.854,41.558 51.854,43.552 51.741,43.665 U6_amplification3.1@51.679,43.665 51.703,43.688 54.081,43.688 R24_amplification3.1@54.104,43.712
NetR24_amplification4_1: R24_amplification4.1 R25_amplification4.2 U6_amplification4.1 | length 4.7
  Top Layer w0.254: R25_amplification4.2@64.954,41.658 64.954,43.652 64.841,43.765 U6_amplification4.1@64.779,43.765 64.803,43.788 67.181,43.788 R24_amplification4.1@67.204,43.812
NetR26_amplification1_2: R26_amplification1.2 R27_amplification1.1 U6_amplification1.8 | length 4.7
  Top Layer w0.254: R27_amplification1.1@18.6,44.108 18.8,44.108 19.043,43.865 U6_amplification1.8@20.484,43.865 ; R26_amplification1.2@20.154,41.758 20.154,42.589 20.371,42.806 20.371,43.752 U6_amplification1.8@20.484,43.865 ; U6_amplification1.8@20.979,43.865 U6_amplification1.8@20.484,43.865
NetR26_amplification2_2: R26_amplification2.2 R27_amplification2.1 U6_amplification2.8 | length 4.7
  Top Layer w0.254: R27_amplification2.1@31.7,43.808 31.9,43.808 32.143,43.565 U6_amplification2.8@33.584,43.565 ; R26_amplification2.2@33.254,41.458 33.254,42.289 33.471,42.506 33.471,43.452 U6_amplification2.8@33.584,43.565 ; U6_amplification2.8@34.079,43.565 U6_amplification2.8@33.584,43.565
NetR26_amplification3_2: R26_amplification3.2 R27_amplification3.1 U6_amplification3.8 | length 4.7
  Top Layer w0.254: R27_amplification3.1@45,43.908 45.2,43.908 45.443,43.665 U6_amplification3.8@46.884,43.665 ; R26_amplification3.2@46.554,41.558 46.554,42.389 46.771,42.606 46.771,43.552 U6_amplification3.8@46.884,43.665 ; U6_amplification3.8@47.379,43.665 U6_amplification3.8@46.884,43.665
NetR26_amplification4_2: R26_amplification4.2 R27_amplification4.1 U6_amplification4.8 | length 4.7
  Top Layer w0.254: R27_amplification4.1@58.1,44.008 58.3,44.008 58.543,43.765 U6_amplification4.8@59.984,43.765 ; R26_amplification4.2@59.654,41.658 59.654,42.489 59.871,42.706 59.871,43.652 U6_amplification4.8@59.984,43.765 ; U6_amplification4.8@60.479,43.765 U6_amplification4.8@59.984,43.765
PLLFILT: C21.2 C24.2 U2.14 | length 3.6
  Top Layer w0.254: U2.14@36.241,68.802 36.778,68.802 37.38,68.2 C21.2@37.38,66.4 ; U2.14@36.243,68.8 36.632,68.8
SCL: J2.4 J4.5 R11.1 | length 50.7
  Top Layer w0.254: R11.1@64.3,82.05 64.423,82.173 66.933,82.173 J2.4@67.1,82.34
  PWR_3V3 w0.254: J4.5@23.452,87.81 24.583,88.941 62.02,88.941 62.961,88 62.961,86.479 J2.4@67.1,82.34
SCLK: J4.23 U2.40 | length 40.2
  Top Layer w0.254: U2.40@29.491,72.302 24.314,72.302 23.197,73.419 23.197,78.497 26.1,81.4 26.1,83.8 28.5,86.2 44.702,86.2 J4.23@46.312,87.81
SDA: J2.3 J4.3 R10.1 | length 52.9
  Top Layer w0.254: R10.1@64.3,78.35 65.65,78.35 J2.3@67.1,79.8
  PWR_3V3 w0.254: J4.3@20.912,87.81 22.362,86.36 58.547,86.36 65.107,79.8 J2.3@67.1,79.8
SS: J4.24 R8.1 U2.41 | length 49.9
  Top Layer w0.254: U2.41@29.491,71.802 24.172,71.802 22.743,73.231 22.743,78.685 25.646,81.588 25.646,83.988 28.337,86.679 44.24,86.679 45.157,87.596 45.157,89.195 J4.24@46.312,90.35
  Bottom Layer w0.254: J4.24@46.312,90.35 46.502,90.16 46.502,89.219 47.539,88.183 47.539,86.111 R8.1@48.65,85
SW1: J4.33 R21.2 S1.4 | length 42.8
  Top Layer w0.254: R21.2@56.3,53.85 59.24,53.85 ; J4.33@59.012,87.81 59.012,87.088 60.746,85.354 60.746,61.212 61.381,60.577 61.381,55.991 59.24,53.85 ; S1.4@62.7,52.4 62.445,52.4 60.995,53.85 59.24,53.85
SW2: J4.32 R20.2 S1.3 | length 83.5
  Top Layer w0.254: R20.2@56.3,59.25 57.131,59.25 57.829,58.552 57.829,58.321 59.15,57 59.85,57 60.927,58.077 60.927,60.389 60.292,61.024 60.292,84.708 57.627,87.373 57.627,89.195 J4.32@56.472,90.35 56.71,90.588 56.71,91.31 57,91.6 59.6,91.6 60.35,90.85 60.35,87.413 61.2,86.563 61.2,61.4 62.7,59.9 S1.3@62.7,53.67
XIN: C35.2 U2.16 XTAL1.1 | length 9.5
  Top Layer w0.15: XTAL1.1@41.888,67.669 41.888,67.468 42.057,67.299 XTAL1.1@42.157,67.299
  Top Layer w0.175: U2.16@36.241,69.802 39.755,69.802 XTAL1.1@41.888,67.669 ; XTAL1.1@42.157,67.299 42.257,67.299 43.192,66.364 C35.2@43.192,65.405
XOUT: R23.2 U2.17 | length 6.3
  Top Layer w0.175: U2.17@36.241,70.302 39.323,70.302 39.905,70.884 41.886,70.884 42.049,71.047 R23.2@42.049,71.247
~FAULT: D2.2 J4.36 | length 32
  Top Layer w0.254: v1(67.9,85) 70.235,82.665 70.235,67.404 68.392,65.561 68.392,64.223 68.019,63.85 D2.2@67.969,63.85
  Bottom Layer w0.254: J4.36@61.552,90.35 61.742,90.16 62.683,90.16 63.786,89.056 64.445,89.056 65.501,88 65.501,87.342 67.843,85 v1(67.9,85)
~PG: D4.2 J4.37 | length 24.4
  Top Layer w0.254: v1(65.4,85.5) 65.4,85.427 69.781,81.046 69.781,68.412 67.919,66.55 D4.2@67.869,66.55
  Bottom Layer w0.254: J4.37@64.092,87.81 64.221,87.681 64.221,86.679 v1(65.4,85.5)
~STATUS_B: D3.3 J4.40 | length 21.9
  Top Layer w0.254: J4.40@66.632,90.35 66.442,90.16 66.442,89.219 65.223,88 65.223,87.123 63.2,85.1 63.2,76.05 67.252,71.998 67.252,71.898 67.45,71.7 D3.3@67.55,71.7
~STATUS_G: D3.2 J4.38 | length 20.7
  Top Layer w0.254: J4.38@64.092,90.35 62.746,89.004 62.746,75.862 65.802,72.806 65.802,71.898 66,71.7 D3.2@66.1,71.7
~STATUS_R: J4.35 R18.1 | length 16.6
  Top Layer w0.254: J4.35@61.552,87.81 61.552,87.473 62.069,86.956 R18.1@62.069,71.45
pads on no net: J4.4 J4.9 J4.14 J4.17 J4.20 J4.25 J4.27 J4.28 J4.30 J4.34 J4.39

## Polygon pours and split planes (outlines as drawn)
GND on GND "GND-GND" (solid, pour order 29): 10.5,89.5 13,92 72,92 74.5,89.5 74.5,24.4 72,21.9 13,21.9 10.5,24.4 10.5,53 18.5,53 18.5,76 10.5,76
GND on GND "GND-GND 1" (solid, pour order 35): 30.1,73.8 30.1,68.3 35.7,68.3 35.7,73.8
no net on GND "GND-No Net 2" (solid, pour order 33): 29.5,74.4
no net on GND "GND-No Net 3" (solid, pour order 31): 29.5,74.4
no net on GND "GND-No Net" (solid, pour order 4): 971.9,52.5
no net on GND "GND-No Net 1" (solid, pour order 2): 988.8,71.9
GND on Top Layer "Top Layer-GND" (solid, pour order 22): 45.095,84.543 45.095,82.543 46.995,82.543 46.995,84.543
3V3 on Top Layer "Top Layer-GND" (solid, pour order 26): 56.4,64.7 56.4,62.7 58.3,62.7 58.3,64.7
GND on Top Layer "Top Layer-GND" (solid, pour order 24): 48.673,56.727 48.673,54.727 50.573,54.727 50.573,56.727
3V3 on PWR_3V3 "PWR_3V3-3V3" (solid, pour order 27): 10.5,89.5 13,92 72,92 74.5,89.5 74.5,24.4 72,21.9 13,21.9 10.5,24.4 10.5,53 18.5,53 18.5,76 10.5,76

## Other copper
Top Layer:
  pour cut-out: 33.3,46.1
GND:
  pour cut-out: 19.5,38.4 26,38.4 26,34.9 19.5,34.9
  pour cut-out: 19.9,46.6 26.4,46.6 26.4,43.1 19.9,43.1
  pour cut-out: 59,38.3 65.5,38.3 65.5,34.8 59,34.8
  pour cut-out: 59.4,46.5 65.9,46.5 65.9,43 59.4,43
  pour cut-out: 45.9,38.2 52.4,38.2 52.4,34.7 45.9,34.7
  pour cut-out: 46.3,46.4 52.8,46.4 52.8,42.9 46.3,42.9
  pour cut-out: 32.6,38.1 39.1,38.1 39.1,34.6 32.6,34.6
  pour cut-out: 33,46.3 39.5,46.3 39.5,42.8 33,42.8
PWR_3V3:
  pour cut-out: 29.3,74.6 36.4,74.6 36.4,67.5 29.3,67.5
  pour cut-out: 19.5,38.4 26,38.4 26,34.9 19.5,34.9
  pour cut-out: 19.9,46.6 26.4,46.6 26.4,43.1 19.9,43.1
  pour cut-out: 59,38.3 65.5,38.3 65.5,34.8 59,34.8
  pour cut-out: 59.4,46.5 65.9,46.5 65.9,43 59.4,43
  pour cut-out: 45.9,38.2 52.4,38.2 52.4,34.7 45.9,34.7
  pour cut-out: 46.3,46.4 52.8,46.4 52.8,42.9 46.3,42.9
  pour cut-out: 32.6,38.1 39.1,38.1 39.1,34.6 32.6,34.6
  pour cut-out: 33,46.3 39.5,46.3 39.5,42.8 33,42.8

## Silkscreen, mask and mechanical layers (free items; w line width, h text height)
Top Overlay:
  text "1" at 18.267,84.6 h0.89 r90
  text "3" at 21.442,84.6 h0.89 r90
  text "5" at 23.982,84.6 h0.89 r90
  text "7" at 26.522,84.6 h0.89 r90
  text "9" at 29.062,84.6 h0.89 r90
  text "11" at 31.602,84.6 h0.89 r90
  text "13" at 34.142,84.6 h0.89 r90
  text "15" at 36.682,84.6 h0.89 r90
  text "17" at 39.222,84.6 h0.89 r90
  text "19" at 41.762,84.6 h0.89 r90
  text "21" at 44.302,84.6 h0.89 r90
  text "23" at 46.842,84.6 h0.89 r90
  text "25" at 49.382,84.6 h0.89 r90
  text "27" at 51.922,84.6 h0.89 r90
  text "29" at 54.462,84.6 h0.89 r90
  text "31" at 57.002,84.6 h0.89 r90
  text "33" at 59.542,84.6 h0.89 r90
  text "35" at 62.082,84.6 h0.89 r90
  text "37" at 64.622,84.6 h0.89 r90
  text "39" at 67.162,84.6 h0.89 r90
  text "SCL" at 68.9,81.7 h1
  text "HMC" at 10.5,81 h1.52
  text "SDA" at 68.9,79.2 h1
  text "RoboSub" at 10.5,78.5 h1.52
  text "3.3V" at 68.9,76.9 h1
  text "Acoustics" at 10.5,76 h1.52
  text "GND" at 68.9,74.2 h1
  text "Status" at 68.9,70.7 h1
  text "3V3" at 69.7,68.4 h1
  text "PG" at 69.8,66 h1
  text "Fault" at 69.6,63.4 h1
  text "AUX_IN" at 67.4,60.7 h1
  text "-" at 18.9,59.4 h1.52 r270
  text "+" at 18.9,54.2 h1.52 r270
  text "SW1" at 71.6,54.1 h1
  text "SW2" at 71.6,51.3 h1
  text "V1.0-1" at 11,51 h1.52
  text "CHN" at 12.5,48.5 h1.52
  text "U5" at 62.1,44.6 h0.5
  text "U5" at 22.6,44.5 h0.5
  text "U5" at 49.1,44.5 h0.5
  text "U5" at 35.7,44.3 h0.5
  text "U1" at 22.4,36.4 h0.5
  text "U1" at 61.9,36.4 h0.5
  text "U1" at 48.8,36.3 h0.5
  text "U1" at 35.4,36.1 h0.5
  text "1" at 17.8,26.2 h1.52
  text "2" at 30.3,26.2 h1.52
  text "3" at 43.8,26.2 h1.52
  text "4" at 56.8,26.2 h1.52
Bottom Overlay:
  drawing of 22 lines, arcs and shapes, not listed
  text "10K" at 51.2,84.8 h0.5
  text "10K" at 51.2,82.4 h0.5
EDGE CUTS:
  lines w0.254: 10.002,24.88 ccw(c13.502,24.88) 13.502,21.38 71.502,21.38 ccw(c71.498,24.876) 74.994,24.88 ; 10.002,24.9 10.002,52.9 cw(c11.001,52.823) 11.025,53.825 15.95,53.825 ccw(c15.95,55.875) 18,55.875 18,73.3 ccw(c16.25,73.325) 16.275,75.075 11,75.075 cw(c10.963,76.037) 10.002,76 10.002,89.08 cw(c13.502,89.08) 13.502,92.58 71.502,92.58 cw(c71.498,89.084) 74.994,89.08 74.994,24.8

## Text inside footprints (layer, text, board x,y; h text height)
C27: Top Overlay "+" at 52.9,69 h1 r90